# EAGLE board PowerShield (EAGLE 6.5.0)
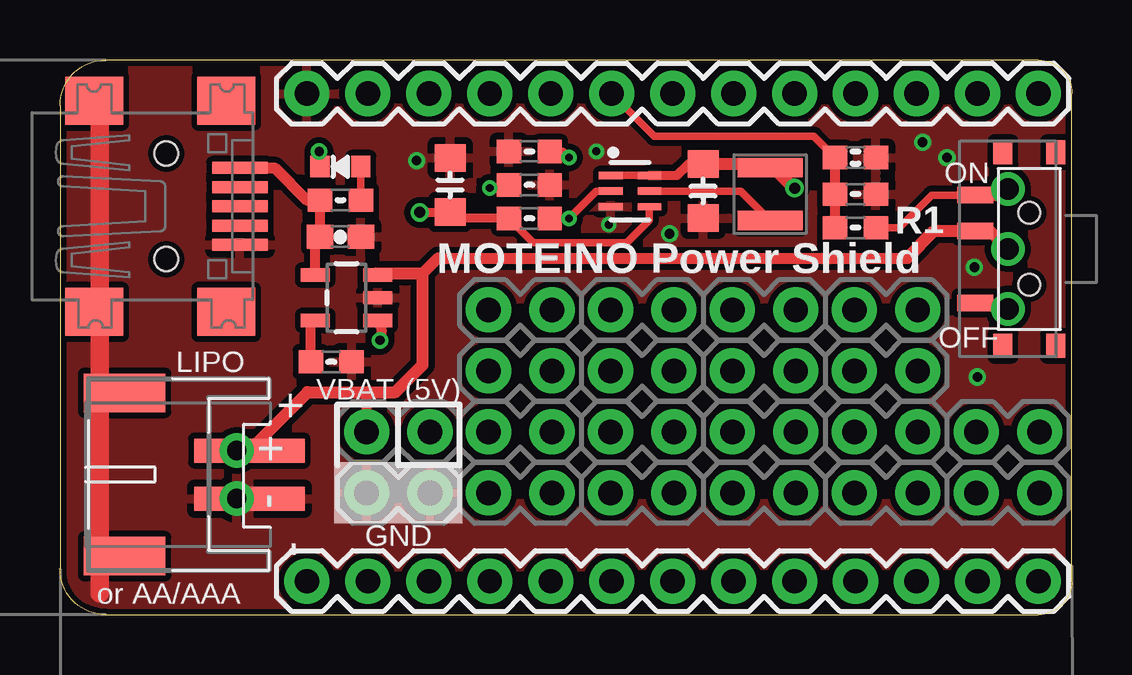
[diagram p0: board, top side]
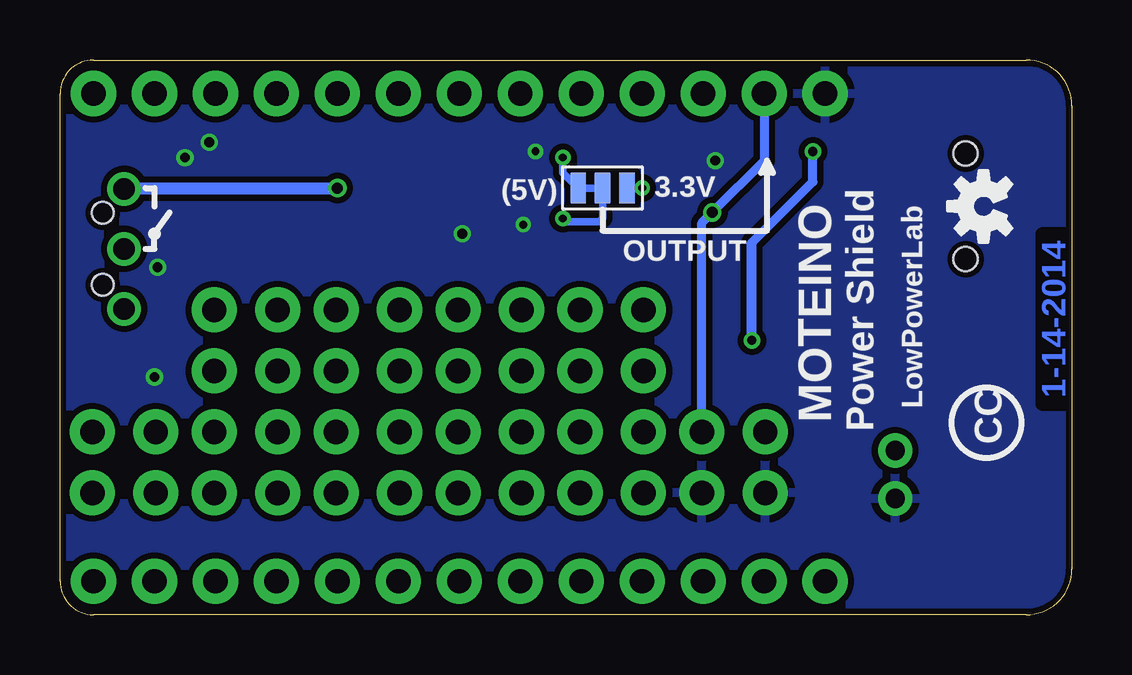
[diagram p1: board, bottom side, seen from below]

Size 42.16 x 23.11 mm. Coordinates in mm from the lower left corner, seen from the top.
Outline: 1.9,0 40.77,0 arc90 42.16,1.4 42.16,21.72 arc90 40.77,23.11 1.9,23.11 arc90 0,21.21 0,1.91 arc90 1.9,0
Copper layers (1*16): Top 0.035mm / dielectric 1.5mm / Bottom 0.035mm
Design rules "ITEADstudio_DRC *": minimum track width 6mil, minimum drill 12mil, track to track 6mil, track to pad 6mil, pad to pad 6mil, via to via 6mil, smd to smd 0mil, copper to edge 10mil, drill to drill 10mil, minimum pad ring 10mil, minimum via ring 6mil, stop-mask expansion 2mil, vias tented up to drill 100mil, thermal gap 12mil
Net classes: 1 power: width 0.381 mm, clearance 0.254 mm
tRestrict: area 11.8,4.8 to 16,5.5
bRestrict: area 11.8,4.8 to 16,5.5

## Footprints (pad centres in the part's own frame; a part is rotated, then mirrored left to right if it is on the bottom)
0805-CAP-LARGEPADS = smd 1.156 x 1.3: 1 -1.127,0; 2 1.127,0
0603-CAP = smd 1.1 x 1: 1 -0.85,0; 2 0.85,0
0603-CAP' = smd 1.016 x 0.965: 1 -0.85,0; 2 0.85,0
JST-PH-2-THM-RA = drill 0.8 pad 1.422: 1 1,0; 2 -1,0
JST-PH-2-SMT-RA = smd 1 x 4.6: 1 1,-3.7; 2 -1,-3.7 | smd 1.6 x 3.4: NC1 -3.4,1.5; NC2 3.4,1.5
USB-MINIB = smd 0.5 x 2.308: D+ 0,4.064; D- -0.8,4.064; GND 1.6,4.064; ID 0.8,4.064; VBUS -1.6,4.064 | smd 2 x 2.4: GND1 -4.4,-2; GND2 -4.4,3.5; GND3 4.4,3.5; GND4 4.4,-2 | hole 1: -2.2,1; 2.2,1
1X13 = drill 1.016 pad 1.88: 1 0,0; 2 2.54,0; 3 5.08,0; 4 7.62,0; 5 10.16,0; 6 12.7,0; 7 15.24,0; 8 17.78,0; 9 20.32,0; 10 22.86,0; 11 25.4,0; 12 27.94,0; 13 30.48,0
INDUCTOR_NR3015 = smd 0.8 x 2.7: P$1 -1.1,0; P$2 1.1,0
0603-RES = smd 1.016 x 0.965: 1 -0.85,0; 2 0.85,0
SOT23-5 = smd 0.55 x 1.2: 1 -0.95,-1.3; 2 0,-1.3; 3 0.95,-1.3; 4 0.95,1.3; 5 -0.95,1.3
SWITCH-SPDT = drill 0.9: 1 0,2.5; 2 0,0; 3 0,-2.5
SOT363 = smd 0.3 x 0.99: 1 -0.65,-0.8; 2 0,-0.8; 3 0.65,-0.8; 4 0.65,0.81; 5 0,0.81; 6 -0.65,0.81
0603-LED = smd 0.8 x 0.9: MINUS -0.85,0; PLUS 0.85,0
KPS-1290 = smd 0.7 x 1.5: O -2.25,2.25; P 0.75,2.25; S 2.25,2.25 | smd 1 x 0.8: P$1 -4.023,1.1; P$2 -4.023,-1.1; P$3 4.023,-1.1; P$4 4.023,1.1 | hole 0.9: -1.5,0; 1.5,0
1X02_NS = drill 1.016 pad 1.88: 1 -1.321,0; 2 1.321,0
JUMPER_3 = smd 0.635 x 1.27: 1 -1.016,0; 2 0,0; 3 1.016,0

## Placement (x,y rotation side)
C1  10u  [0805-CAP-LARGEPADS]  26.8,17.65 270 top
C2  10u  [0805-CAP-LARGEPADS]  16.26,17.91 90 top
C3  4u7  [0603-CAP]  11.68,15.75 0 top
C8  0u1  [0603-CAP']  33.15,19.05 0 top
CN1  [JST-PH-2-THM-RA]  7.37,5.84 90 top
CN3  [JST-PH-2-SMT-RA]  4.19,5.84 90 top
CN4  [USB-MINIB]  3.43,17.02 270 top
DIGITALSIDE  HDR_13PINREGULAR  [1X13]  40.77,1.4 180 top
L1  4.7uH  [INDUCTOR_NR3015]  29.59,17.53 90 top
PWR&ANALOG  HDR_13PINREGULAR  [1X13]  40.77,21.72 180 top
R1  470K  [0603-RES]  33.15,17.53 180 top
R2  1M  [0603-RES]  33.15,16.13 180 top
R3  1k5  [0603-RES]  11.68,17.27 0 top
R4  2K  [0603-RES]  11.3,10.54 180 top
R5  1M  [0603-RES]  19.56,16.51 180 top
R6  180K  [0603-RES]  19.56,17.91 180 top
R7  110K  [0603-RES]  19.56,19.3 0 top
U1  MCP73831  [SOT23-5]  11.94,13.21 90 top
U$1  SWITCH_SPDT  [SWITCH-SPDT]  39.5,15.24 0 top
U$2  TPS61222SOT363  [SOT363]  23.75,17.65 270 top
U$3  [OSHW-LOGO-S]  3.68,17.02 90 bottom
U$4  LED0603  [0603-LED]  11.68,18.67 0 top
U$5  SWITCH_SPDT  [KPS-1290]  40.39,15.24 90 top
U$6  HDR_2PIN  [1X02_NS]  19.18,12.7 0 top
U$7  HDR_2PIN  [1X02_NS]  19.18,10.16 0 top
U$8  HDR_2PIN  [1X02_NS]  19.18,7.62 0 top
U$9  HDR_2PIN  [1X02_NS]  19.18,5.08 0 top
U$10  HDR_2PIN  [1X02_NS]  24.26,12.7 0 top
U$11  HDR_2PIN  [1X02_NS]  24.26,10.16 0 top
U$12  HDR_2PIN  [1X02_NS]  24.26,7.62 0 top
U$13  HDR_2PIN  [1X02_NS]  24.26,5.08 0 top
U$14  HDR_2PIN  [1X02_NS]  29.34,12.7 0 top
U$15  HDR_2PIN  [1X02_NS]  29.34,10.16 0 top
U$16  HDR_2PIN  [1X02_NS]  29.34,7.62 0 top
U$17  HDR_2PIN  [1X02_NS]  29.34,5.08 0 top
U$18  HDR_2PIN  [1X02_NS]  34.42,12.7 0 top
U$19  HDR_2PIN  [1X02_NS]  34.42,10.16 0 top
U$20  HDR_2PIN  [1X02_NS]  34.42,7.62 0 top
U$21  HDR_2PIN  [1X02_NS]  34.42,5.08 0 top
U$22  HDR_2PIN  [1X02_NS]  39.5,7.62 0 top
U$23  HDR_2PIN  [1X02_NS]  39.5,5.08 0 top
U$24  HDR_2PIN  [1X02_NS]  14.1,5.08 0 top
U$25  HDR_2PIN  [1X02_NS]  14.1,7.62 0 top
U$26  JUMPER_3  [JUMPER_3]  19.56,17.78 0 bottom

## Library data of the parts
C1 C2 C8 CN4 DIGITALSIDE L1 PWR&ANALOG R1-R7 U$1 U$2 U$4 U$6-U$26 = LowPowerLab
C3 U1 = SparkFun
CN1 CN3 = adafruit
U$3 = SparkFun-Aesthetics
U$5 = SparkFun-Electromechanical

## Nets
A0: PWR&ANALOG.1
A1: PWR&ANALOG.2
A2: PWR&ANALOG.3
A3: PWR&ANALOG.4
A4_SDA: PWR&ANALOG.5
A5_SCL: PWR&ANALOG.6
A6: PWR&ANALOG.7
A7: C8.1 PWR&ANALOG.8 R1.2 R2.2
D0_RX: PWR&ANALOG.9
D1_TX: PWR&ANALOG.10
D2: DIGITALSIDE.12
D3: DIGITALSIDE.11
D4: DIGITALSIDE.10
D5: DIGITALSIDE.9
D6: DIGITALSIDE.8
D7: DIGITALSIDE.7
D8: DIGITALSIDE.6
D9: DIGITALSIDE.5
D10_SS: DIGITALSIDE.4
D11_MOSI: DIGITALSIDE.3
D12_MISO: DIGITALSIDE.2
D13_SCK: DIGITALSIDE.1
GND [power]: C1.2 C2.2 C3.2 C8.2 CN1.2 CN3.2 CN4.GND PWR&ANALOG.13 R1.1 R4.1 R6.1 R7.1 U1.2 U$2.3 U$24.1 U$24.2
N$1: L1.P$1 U$2.5
N$3: R3.2 U$4.PLUS
N$4: R6.2 U$26.3
N$5: R7.2 U$26.1
N$7: R5.1 U$2.2 U$26.2
PROG: R4.2 U1.5
RST: DIGITALSIDE.13
STAT: U1.1 U$4.MINUS
VBAT: CN1.1 CN3.1 U1.3 U$1.2 U$5.P U$25.1
VBAT_SWITCHED [power]: C1.1 L1.P$2 R2.1 U$1.1 U$2.1 U$2.6 U$5.S
VCC: PWR&ANALOG.11
VIN_MOTEINO [power]: C2.1 PWR&ANALOG.12 R5.2 U$2.4 U$25.2
VUSB: C3.1 CN4.VBUS R3.1 U1.4

## Tracks (layer width: path | path; a pad name or v marks a point on that pad's centre or on a via)
A7
  Top 0.305: C8.1 31.41,19.94 24.77,19.94 PWR&ANALOG.8
  Top 0.406: C8.1 R1.2 R2.2
GND  (via drill 0.33, 0.41)
  Top 0.762: 1.65,21.34 1.65,0.89
  other vias: 25.4,15.88 36.96,19.05 35.94,19.68 38.1,14.48 38.23,9.91 14.86,18.92 22.35,19.3 22.86,16.26
  pour Bottom: -1.27,24 -1.27,-0.76 42.93,-0.76 42.93,24
  pour Top (isolate 0.051): -1.27,24 -1.27,-0.76 42.93,-0.76 42.93,24
N$1
  Top 0.305: U$2.5 28.36,17.65 L1.P$1
N$3
  Top 0.305: R3.2 U$4.PLUS
N$4  (via drill 0.33)
  Top 0.305: v17.91,17.78 18.58,17.78 R6.2
  Bottom 0.305: U$26.3 v17.91,17.78
N$5  (via drill 0.33)
  Top 0.305: R7.2 20.96,19.3 v21.21,19.05
  Bottom 0.305: v21.21,19.05 21.21,18.41 U$26.1
N$7  (via drill 0.33)
  Top 0.305: U$2.2 22.35,17.65 v21.21,16.51 R5.1
  Bottom 0.305: v21.21,16.51 21.08,16.38 19.69,16.38 19.56,16.51 U$26.2 20.45,17.78
PROG
  Top 0.406: R4.2 10.45,12.19 U1.5
STAT  (via drill 0.38)
  Top 0.305: v10.79,19.3 10.71,19.27 U$4.MINUS
  Top 0.406: U1.1 13.4,11.88 v13.33,11.43
  Bottom 0.381: 13.33,15.49 10.79,18.03 v10.79,19.3
  Bottom 0.406: v13.33,11.43 13.33,15.49
VBAT
  Top 0.381: CN3.1 7.13,6.97 CN1.1
  Top 0.406: U$25.1 12.78,9.22 12.83,9.27
  Top 0.457: 15.11,14.22 15.75,14.86 35.31,14.86
  Top 0.508: U1.3 13.17,14.22 15.11,14.22 15.11,13.59 15.11,10.41 14.22,9.53 | CN3.1 10.32,9.27 12.83,9.27 13.97,9.27 | 35.31,14.86 36.44,15.99 U$5.P 38.75,15.99 U$1.2 | 13.97,9.27 14.22,9.53 | 14.22,9.53 13.97,9.27 | 13.97,9.27 14.22,9.53
VBAT_SWITCHED  (via drill 0.46)
  Top 0.305: L1.P$2 28.42,18.78 | R2.1 34.97,16.13 36.32,17.49 38.35,17.49 | U$2.1 U$2.6
  Top 0.381: C1.1 26.18,18.78 25.7,18.3 U$2.6
  Top 0.508: L1.P$2 29.68,18.67 v30.61,17.78 | 28.42,18.78 C1.1 | U$5.S 38.35,17.49 39.15,17.49 39.53,17.74 U$1.1
  Bottom 0.508: v30.61,17.78 30.82,17.74 U$1.1
VIN_MOTEINO  (via drill 0.46)
  Top 0.305: U$2.4 24.56,16.43 23.62,15.49 19.72,15.49 R5.2
  Top 0.381: R5.2 16.78,16.51 C2.1 16.24,16.76 v14.99,16.76
  Bottom 0.381: PWR&ANALOG.12 12.83,18.92 v14.99,16.76 15.42,16.33 U$25.2
VUSB
  Top 0.406: U1.4 10.64,15.56 C3.1 10.83,16 | 10.83,16 R3.1 | 10.68,15.65 10.83,16
  Top 0.457: CN4.VBUS 8.94,18.62 10.29,17.27 R3.1

## Text on the board
Bottom: 1-14-2014
tPlace: ON | R1 | MOTEINO Power Shield | OFF | LIPO | VBAT | (5V) | GND | or AA/AAA
bPlace: 3.3V | (5V) | OUTPUT | LowPowerLab | Power Shield | MOTEINO | CC
_tsilk: (5V) | GND
_bsilk: (5V) | 3.3 | 1 | 0 | A7 | A6 | A5 | A4 | A3 | A2 | A1 | A0 | GND | 2 | 3 | 4 | 5 | 6 | 7 | 8 | 9 | 10 | 11 | 12 | 13 | RST